# Altium PCB InverterPCB.PcbDoc
Units mm, origin at the board's own origin, x right, y up, seen from the top; angles counter-clockwise.
Board outline 152.4 x 101.6 mm, 2 copper layers (Top Layer, Bottom Layer); 87 components, 59 nets, 321 pads, 0 vias.
Unrouted connection lines stored in the file: 187.
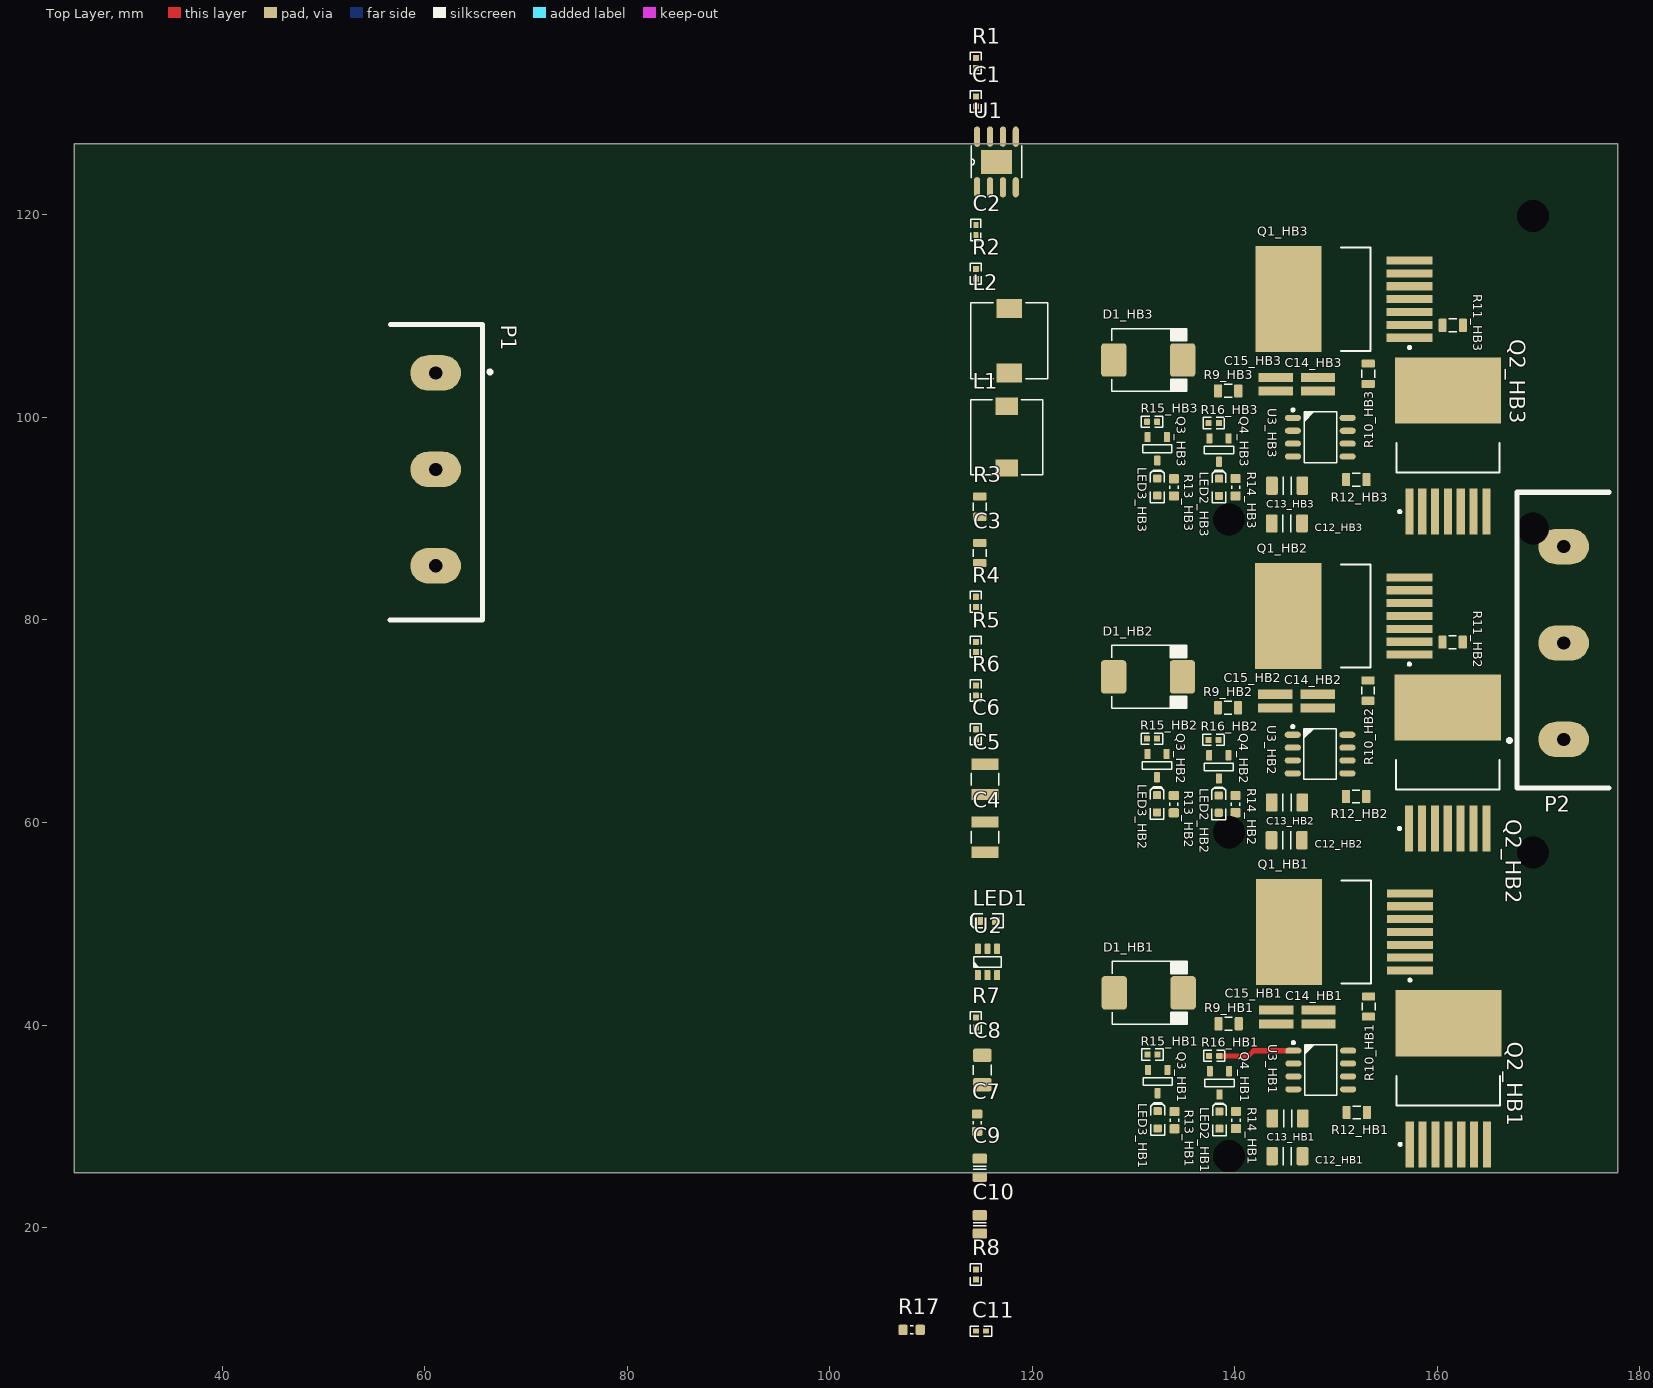
[diagram p0: Top Layer view]
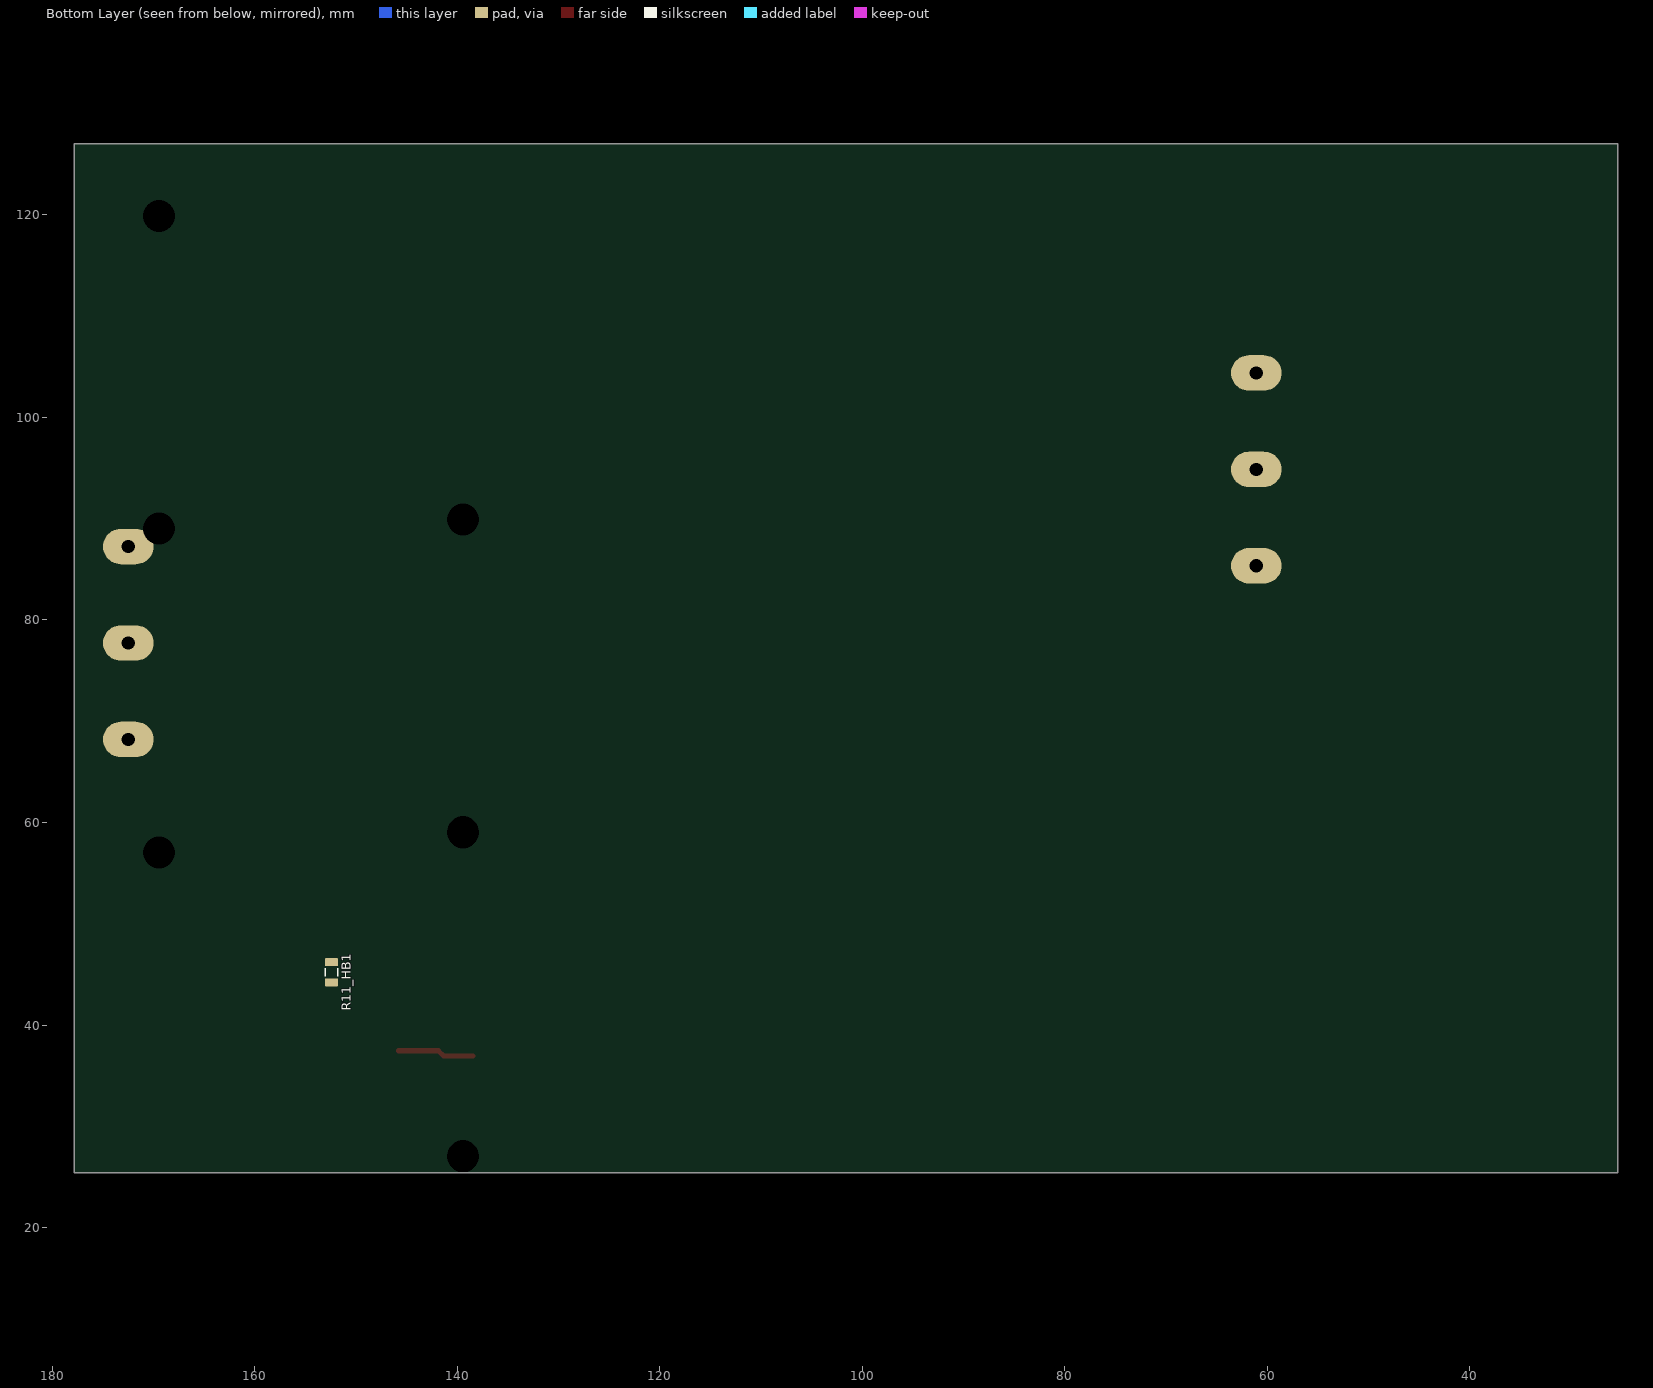
[diagram p1: Bottom Layer view, seen from below]

## Layer stack, top to bottom
Top Solder: solder mask 0.0102, Solder Resist, Dk 3.5
Top Layer: signal copper 0.0356
Dielectric 1: dielectric 0.32, FR-4, Dk 4.8
Bottom Layer: signal copper 0.0356
Bottom Solder: solder mask 0.0102, Solder Resist, Dk 3.5

## Board outline
25.4,25.4 177.8,25.4 177.8,127 25.4,127

## Design rules (kind name [scope] priority, off if disabled: settings)
Clearance Clearance_1 [All] p1: gap=0.152 ignorepadtopadclearanceinfootprint=FALSE
Clearance [InNet('350V')] p2: gap=0.152 ignorepadtopadclearanceinfootprint=FALSE
HoleSize [All] p1: absolutevalues=TRUE maxlimit=25.4 minlimit=0.3 maxpercent=80.000 minpercent=20.000
MinimumAnnularRing [All] p1: minimumring=0.152
MinimumSolderMaskSliver [All] p1: minsoldermaskwidth=0.102
PolygonConnect [All] p1: connectstyle=Relief reliefconductorwidth=0.254 reliefentries=4 polygonreliefangle="90 Angle" airgapwidth=0.254
RoomDefinition HB3 [InComponentClass('HB3')] p1: confinementstyle=ConfineIn formatcopy=TRUE lockcomponents=FALSE outline 125.095,88.011 166.878,88.011 166.878,118.999 125.095,118.999
RoomDefinition HB2 [InComponentClass('HB2')] p2: confinementstyle=ConfineIn formatcopy=TRUE lockcomponents=FALSE outline 125.076,56.727 166.859,56.727 166.859,87.715 125.076,87.715
RoomDefinition HB1 [InComponentClass('HB1')] p3: confinementstyle=ConfineIn formatcopy=TRUE lockcomponents=FALSE outline 125.14,25.527 166.923,25.527 166.923,56.515 125.14,56.515
RoutingVias [All] p1: holewidth=0.254 width=0.508 viastyle="Through Hole" minholewidth=0.203 minwidth=0.457 maxholewidth=25.4 maxwidth=25.4
SilkToSilkClearance [All] p1: silktosilkclearance=0
SilkToSolderMaskClearance [IsPad] p1: minsilkscreentomaskgap=0.102 clearancetoexposedcopper=TRUE
SolderMaskExpansion [All] p1: expansion=0.102
Width [All] p1: maxlimit=25.4 minlimit=0.102 preferedwidth=0.254
26 further rules are at their usual default settings.

## Classes and differential pairs
component class 3.3VPWR: C1 C2 C3 C4 C5 C6 C7 C8 C9 C10 C11 L1 L2 LED1 R1 R2 R3 R4 R5 R6 R7 R8 U1 U2
component class HB1: C12_HB1 C13_HB1 C14_HB1 C15_HB1 D1_HB1 LED2_HB1 LED3_HB1 Q1_HB1 Q2_HB1 Q3_HB1 Q4_HB1 R9_HB1 R10_HB1 R11_HB1 R12_HB1 R13_HB1 R14_HB1 R15_HB1 R16_HB1 U3_HB1
component class HB2: C12_HB2 C13_HB2 C14_HB2 C15_HB2 D1_HB2 LED2_HB2 LED3_HB2 Q1_HB2 Q2_HB2 Q3_HB2 Q4_HB2 R9_HB2 R10_HB2 R11_HB2 R12_HB2 R13_HB2 R14_HB2 R15_HB2 R16_HB2 U3_HB2
component class HB3: C12_HB3 C13_HB3 C14_HB3 C15_HB3 D1_HB3 LED2_HB3 LED3_HB3 Q1_HB3 Q2_HB3 Q3_HB3 Q4_HB3 R9_HB3 R10_HB3 R11_HB3 R12_HB3 R13_HB3 R14_HB3 R15_HB3 R16_HB3 U3_HB3
component class "Inverter Main": P1 P2 R17
net class OUTPUT[1..3]: OUTPUT1 OUTPUT2 OUTPUT3
channel class Half_Bridge: HB1 HB2 HB3

## Components (designator, comment, footprint, x,y, rotation, side; value= is the part's Value field where it differs from the comment)
C1 "GRM155R61A104KA0" 0402 114.427,131.191 r90 top value=Value
C2 "10n" CAPC1005X55N 114.427,118.491 r90 top
C3 "C0805C100M4GACTU" 0805 114.808,86.614 r90 top value=Value
C4 "GRM32ER7YA106KA1" 1210_280 115.316,58.547 r90 top value=Value
C5 "GRM32ER7YA106KA1" 1210_280 115.316,64.262 r90 top value=Value
C6 "GRM155R60J225ME1" 0402 114.427,68.707 r90 top value=Value
C7 "GRM188R61A105KA6" 0603 114.554,30.353 r90 top value=Value
C8 "C3216JB1A476M" 1206 115.062,35.56 r90 top value=Value
C9 "approved sub OK" CAPC2012X135N 114.808,25.908 r90 top value=100n
C10 "approved sub OK" CAPC2012X135N 114.808,20.32 r90 top value=1n8
C11 "10n" CAPC1005X55N 114.935,9.779 r180 top
C12_HB1 "approved sub OK" CAPC3216X180N 145.177,27.051 r180 top value=2µ2 (schematic designator C12)
C12_HB2 "approved sub OK" CAPC3216X180N 145.113,58.251 r180 top value=2µ2 (schematic designator C12)
C12_HB3 "approved sub OK" CAPC3216X180N 145.132,89.535 r180 top value=2µ2 (schematic designator C12)
C13_HB1 "approved sub OK" CAPC3216X180N 145.206,30.776 r180 top value=2µ2 (schematic designator C13)
C13_HB2 "approved sub OK" CAPC3216X180N 145.142,61.976 r180 top value=2µ2 (schematic designator C13)
C13_HB3 "approved sub OK" CAPC3216X180N 145.161,93.26 r180 top value=2µ2 (schematic designator C13)
C14_HB1 "approved sub OK" CAPC1632X07N 148.254,40.793 r90 top value=220n (schematic designator C14)
C14_HB2 "approved sub OK" CAPC1632X07N 148.19,71.993 r90 top value=220n (schematic designator C14)
C14_HB3 "approved sub OK" CAPC1632X07N 148.209,103.277 r90 top value=220n (schematic designator C14)
C15_HB1 "approved sub OK" CAPC1632X07N 144.063,40.793 r90 top value=100n (schematic designator C15)
C15_HB2 "approved sub OK" CAPC1632X07N 143.999,71.993 r90 top value=100n (schematic designator C15)
C15_HB3 "approved sub OK" CAPC1632X07N 144.018,103.277 r90 top value=100n (schematic designator C15)
D1_HB1 "FR10M-TP" DO-214AB 131.49,43.18 r0 top (schematic designator D1)
D1_HB2 "FR10M-TP" DO-214AB 131.426,74.38 r0 top (schematic designator D1)
D1_HB3 "FR10M-TP" DO-214AB 131.445,105.664 r0 top (schematic designator D1)
L1 "CLF7045T-3R3N" CLF7045 117.475,98.044 r90 top value=Value
L2 "SLC7649S-101KLB" SLC7649 117.729,107.569 r90 top value=Value
LED1 "Green" LED-0603-GREEN 115.57,50.292 r180 top
LED2_HB1 "APT1608CGCK" LED-0603-GREEN 138.467,30.615 r90 top (schematic designator LED2)
LED2_HB2 "APT1608CGCK" LED-0603-GREEN 138.403,61.815 r90 top (schematic designator LED2)
LED2_HB3 "APT1608CGCK" LED-0603-GREEN 138.422,93.099 r90 top (schematic designator LED2)
LED3_HB1 "LO L296-Q2S1-24-Z" LED-0603-AMBER 132.379,30.646 r90 top (schematic designator LED3)
LED3_HB2 "LO L296-Q2S1-24-Z" LED-0603-AMBER 132.315,61.846 r90 top (schematic designator LED3)
LED3_HB3 "LO L296-Q2S1-24-Z" LED-0603-AMBER 132.334,93.13 r90 top (schematic designator LED3)
P1 "3P_TERM BLOCK 796739-3" "TE 796739-3 3 Screw Terminal" 61.087,94.869 r270 top
P2 "3P_TERM BLOCK 796739-3" "TE 796739-3 3 Screw Terminal" 172.466,77.724 r90 top
Q1_HB1 "C3M0065090D" DPAK127P1618X457-8N 150.54,49.191 r180 top (schematic designator Q1)
Q1_HB2 "C3M0065090D" DPAK127P1618X457-8N 150.476,80.391 r180 top (schematic designator Q1)
Q1_HB3 "C3M0065090D" DPAK127P1618X457-8N 150.495,111.675 r180 top (schematic designator Q1)
Q2_HB1 "C3M0065090D" DPAK127P1618X457-8N 161.081,34.967 r90 top (schematic designator Q2)
Q2_HB2 "C3M0065090D" DPAK127P1618X457-8N 161.017,66.167 r90 top (schematic designator Q2)
Q2_HB3 "C3M0065090D" DPAK127P1618X457-8N 161.036,97.451 r90 top (schematic designator Q2)
Q3_HB1 "Si2304DDS" SOT23-3 132.379,34.417 r270 top (schematic designator Q3)
Q3_HB2 "Si2304DDS" SOT23-3 132.315,65.617 r270 top (schematic designator Q3)
Q3_HB3 "Si2304DDS" SOT23-3 132.334,96.901 r270 top (schematic designator Q3)
Q4_HB1 "Si2304DDS" SOT23-3 138.475,34.29 r270 top (schematic designator Q4)
Q4_HB2 "Si2304DDS" SOT23-3 138.411,65.49 r270 top (schematic designator Q4)
Q4_HB3 "Si2304DDS" SOT23-3 138.43,96.774 r270 top (schematic designator Q4)
R1 "Thick Film" RESC1005X40N 114.427,135.001 r90 top value=68K
R2 "Thick Film" RESC1005X40N 114.427,114.173 r90 top value=100K
R3 "Thick film" RESC2012X70N 114.808,91.186 r90 top value=12m
R4 "CRCW040284K5FKED" 0402 114.427,81.788 r90 top value=Value
R5 "Thick Film" RESC1005X40N 114.427,77.343 r90 top value=68R
R6 "Thick Film" RESC1005X40N 114.427,73.025 r90 top value=10K
R7 "CRCW040225K5FKED" 0402 114.427,40.259 r90 top value=Value
R8 "Thick Film" RESC1005X40N 114.427,15.367 r90 top value=40.2K
R9_HB1 "Jumper" RESC2012N_ZERO 139.38,40.132 r0 top value=0R (schematic designator R9)
R9_HB2 "Jumper" RESC2012N_ZERO 139.316,71.332 r0 top value=0R (schematic designator R9)
R9_HB3 "Jumper" RESC2012N_ZERO 139.335,102.616 r0 top value=0R (schematic designator R9)
R10_HB1 "Thick Film" RESC2012X70N 153.207,41.825 r90 top value=3R3 (schematic designator R10)
R10_HB2 "Thick Film" RESC2012X70N 153.143,73.025 r90 top value=3R3 (schematic designator R10)
R10_HB3 "Thick Film" RESC2012X70N 153.162,104.309 r90 top value=3R3 (schematic designator R10)
R11_HB1 "Jumper" RESC2012N_ZERO 152.4,45.212 r90 bottom value=0R (schematic designator R11)
R11_HB2 "Jumper" RESC2012N_ZERO 161.496,77.809 r180 top value=0R (schematic designator R11)
R11_HB3 "Jumper" RESC2012N_ZERO 161.515,109.093 r180 top value=0R (schematic designator R11)
R12_HB1 "Thick Film" RESC2012X70N 152.035,31.369 r0 top value=3R3 (schematic designator R12)
R12_HB2 "Thick Film" RESC2012X70N 151.971,62.569 r0 top value=3R3 (schematic designator R12)
R12_HB3 "Thick Film" RESC2012X70N 151.99,93.853 r0 top value=3R3 (schematic designator R12)
R13_HB1 "Thick Film" RESC1608X55N 134.03,30.607 r270 top value=68R (schematic designator R13)
R13_HB2 "Thick Film" RESC1608X55N 133.966,61.807 r270 top value=68R (schematic designator R13)
R13_HB3 "Thick Film" RESC1608X55N 133.985,93.091 r270 top value=68R (schematic designator R13)
R14_HB1 "Thick Film" RESC1608X55N 140.118,30.615 r270 top value=68R (schematic designator R14)
R14_HB2 "Thick Film" RESC1608X55N 140.054,61.815 r270 top value=68R (schematic designator R14)
R14_HB3 "Thick Film" RESC1608X55N 140.073,93.099 r270 top value=68R (schematic designator R14)
R15_HB1 "Thick Film" RESC1005X40N 131.871,37.084 r180 top value=10K (schematic designator R15)
R15_HB2 "Thick Film" RESC1005X40N 131.807,68.284 r180 top value=10K (schematic designator R15)
R15_HB3 "Thick Film" RESC1005X40N 131.826,99.568 r180 top value=10K (schematic designator R15)
R16_HB1 "Thick Film" RESC1005X40N 137.959,36.957 r180 top value=10K (schematic designator R16)
R16_HB2 "Thick Film" RESC1005X40N 137.895,68.157 r180 top value=10K (schematic designator R16)
R16_HB3 "Thick Film" RESC1005X40N 137.914,99.441 r180 top value=10K (schematic designator R16)
R17 "Thick Film" RESC1608N_ZERO 108.077,9.906 r180 top value=0R
U1 "TPS54339DDAR" DDA0008E 116.459,125.222 r90 top value=Value
U2 "TS1101-50EG6T" SOT23-6 115.57,46.228 r90 top
U3_HB1 "FAN7390MX" SOIC127P600X175-8AN 148.479,35.56 r0 top (schematic designator U3)
U3_HB2 "FAN7390MX" SOIC127P600X175-8AN 148.415,66.76 r0 top (schematic designator U3)
U3_HB3 "FAN7390MX" SOIC127P600X175-8AN 148.434,98.044 r0 top (schematic designator U3)

## Footprints (in the part's own frame and the unit in brackets; to place one, negate y for a bottom-side part, rotate by r counter-clockwise, add the part's x,y. Pads: shape width x height; smd on the part's side, far side on the other; paste and mask are expansions set on the pad)
0402 [mm] "Chip Resistor, Body 1.0x0.5mm, EIA 0402, IPC Medium Density"
  round 0.2 on Mech15: 0(0,0)
  rrect20% 0.6x0.6 smd: 1(-0.5,0) 2(0.5,0)
  Top Layer pour cut-out: -0.325,0.375 -0.2,0.5 0.2,0.5 0.325,0.375 0.325,-0.375 0.2,-0.5 -0.2,-0.5 -0.325,-0.375
  silkscreen extent -1.05,-0.55 1.05,0.55, body extent -0.52,-0.27 0.53,0.28, height 0.4
0603 [mm] "Chip Resistor, Body 1.6x0.8mm, EIA 0603, IPC Medium Density"
  round 0.254 on Mech15: 0(0,0)
  rrect25% 0.9x1 smd: 1(-0.85,0) 2(0.85,0)
  Top Layer pour cut-out: -0.6,0.5 -0.4,0.7 0.4,0.7 0.6,0.5 0.6,-0.5 0.4,-0.7 -0.4,-0.7 -0.6,-0.5
  silkscreen extent -0.15,-0.41 0.15,0.41, body extent -0.87,-0.47 0.88,0.48, height 0.54
0805 [mm] "Chip Resistor, Body 2.0x1.2mm, EIA 0805, IPC Medium Density"
  round 0.254 on Mech15: 0(0,0)
  rrect25% 0.8x1.3 smd: 1(-1,0) 2(1,0)
  Top Layer pour cut-out: -0.725,0.65 -0.525,0.85 0.525,0.85 0.725,0.65 0.725,-0.65 0.525,-0.85 -0.525,-0.85 -0.725,-0.65
  silkscreen extent -0.38,-0.64 0.38,0.64, body extent -1.1,-0.67 1.1,0.68, height 0.69
1206 [mm] "Chip Resistor, Body 3.2x1.6mm, EIA 1206, IPC Medium Density"
  round 0.508 on Mech15: 0(0,0)
  rrect25% 1.3x1.8 smd: 1(-1.45,0) 2(1.45,0)
  silkscreen extent -0.51,-0.89 0.51,0.89, body extent -1.62,-0.82 1.63,0.83, height 0.69
1210_280 [mil]
  rect 44x106 smd: 1(-59,0) 2(59,0)
  silkscreen extent -24,-53 24,53, body extent -63,-49 63,49, height 98
CAPC1005X55N [mm] "Chip Capacitor, Body 1.0x0.5mm, EIA 0402, IPC Medium Density"
  round 0.2 on Mech15: 0(0,0)
  rrect20% 0.6x0.5 smd: 1(-0.5,0) 2(0.5,0)
  Top Layer pour cut-out: -0.325,0.375 -0.2,0.5 0.2,0.5 0.325,0.375 0.325,-0.375 0.2,-0.5 -0.2,-0.5 -0.325,-0.375
  silkscreen extent -1.05,-0.5 1.05,0.5, body extent -0.52,-0.27 0.53,0.28, height 0.55
CAPC1632X07N [mm] "Chip Capacitor, 0612 (1632M)  2-Leads, Body 1.60x3.20mm, IPC Medium Density"
  rect 0.9x3.4 smd: 1(-0.675,0) 2(0.675,0)
  body extent -0.87,-1.68 0.87,1.68, height 0.7
CAPC2012X135N [mm] "Chip Capacitor, Body 2.0x1.2mm, EIA 0805, IPC Medium Density"
  round 0.254 on Mech15: 0(0,0)
  rrect25% 1x1.4 smd: 1(-0.9,0) 2(0.9,0)
  silkscreen extent -0.15,-0.65 0.15,0.65, body extent -1.1,-0.72 1.1,0.73, height 1.34
CAPC3216X180N [mm] "Chip Capacitor, Body 3.2x1.6mm, 1.8mm H, EIA 1206, IPC Medium Density"
  round 0.508 on Mech15: 0(0,0)
  rrect25% 1.15x1.8 smd: 1(-1.5,0) 2(1.5,0)
  silkscreen extent -0.4,-0.88 0.4,0.88, body extent -1.7,-0.9 1.7,0.9, height 1.8
CLF7045 [mil]
  rect 67x87 smd: 1(-120,0) 2(120,0)
  silkscreen extent -146,-140 146,140, body extent -142,-136 142,136, height 213
DDA0008E [mm]
  oval 2x0.6 smd paste-0.102 mask+0.051: 1(-2.5,1.905) 2(-2.5,0.635) 3(-2.5,-0.635) 4(-2.5,-1.905) 5(2.5,-1.905) 6(2.5,-0.635) 7(2.5,0.635) 8(2.5,1.905)
  rect 2.4x3.1 smd paste-0.102 mask+0.051: 9(0,0)
  silkscreen extent -1.58,-2.49 1.58,2.49, body extent -3,-2.45 3,2.45, height 1.75
DO-214AB [mm] "JEDEC DO214 variation AB. SMC"
  round 0.508 on Mech15: 0(0,0)
  rrect25% 2.5x3.3 smd: A(-3.4,0) K(3.4,0)
  silkscreen extent -3.6,-3.1 3.8,3.1, body extent -3.98,-2.98 4.05,2.98, height 2.62
DPAK127P1618X457-8N [mm] "TO, 8-Pads, Body 7.66x8.48mm (max), IPC Medium Density"
  rect 4.55x0.8 smd: 1(-6.75,3.81) 2(-6.75,2.54) 3(-6.75,1.27) 4(-6.75,0) 5(-6.75,-1.27) 6(-6.75,-2.54) 7(-6.75,-3.81)
  rect 6.538x10.48 smd: 8(5.2,0)
  silkscreen extent -6.88,-5.1 0,5.1, body extent -8.21,-5.13 7.96,5.13, height 4.82
LED-0603-AMBER [mm]
  round 0.254 on Mech15: 0(0,0)
  rrect25% 0.8x0.8 smd: A(-0.85,0) K(0.85,0)
  Top Layer pour cut-out: -0.5,0.5 0.5,0.5 0.5,-0.5 -0.5,-0.5
  silkscreen extent -1.55,-0.67 1.68,0.67, body extent -0.8,-0.4 0.8,0.4, height 0.75
LED-0603-GREEN [mm]
  round 0.254 on Mech15: 0(0,0)
  rrect25% 0.8x0.8 smd: A(-0.85,0) K(0.85,0)
  Top Layer pour cut-out: -0.5,0.5 0.5,0.5 0.5,-0.5 -0.5,-0.5
  silkscreen extent -1.55,-0.67 1.68,0.67, body extent -0.8,-0.4 0.8,0.4, height 0.75
RESC1005X40N [mm] "Chip Resistor, Body 1.0x0.5mm, EIA 0402, IPC Medium Density"
  round 0.2 on Mech15: 0(0,0)
  rrect20% 0.6x0.6 smd: 1(-0.5,0) 2(0.5,0)
  Top Layer pour cut-out: -0.325,0.375 -0.2,0.5 0.2,0.5 0.325,0.375 0.325,-0.375 0.2,-0.5 -0.2,-0.5 -0.325,-0.375
  silkscreen extent -1.05,-0.55 1.05,0.55, body extent -0.52,-0.27 0.53,0.28, height 0.4
RESC1608N_ZERO [mm] "Chip Resistor, Body 1.6x0.8mm, 0603, IPC Medium Density"
  round 0.254 on Mech15: 0(0,0)
  rrect25% 0.9x1 smd: 1(-0.85,0) 2(0.85,0)
  Top Layer pour cut-out: -0.6,0.5 -0.4,0.7 0.4,0.7 0.6,0.5 0.6,-0.5 0.4,-0.7 -0.4,-0.7 -0.6,-0.5
  silkscreen extent -0.15,-0.41 0.15,0.41, body extent -0.87,-0.47 0.88,0.48, height 0.54
RESC1608X55N [mm] "Chip Resistor, Body 1.6x0.8mm, EIA 0603, IPC Medium Density"
  round 0.254 on Mech15: 0(0,0)
  rrect25% 0.9x1 smd: 1(-0.85,0) 2(0.85,0)
  Top Layer pour cut-out: -0.6,0.5 -0.4,0.7 0.4,0.7 0.6,0.5 0.6,-0.5 0.4,-0.7 -0.4,-0.7 -0.6,-0.5
  silkscreen extent -0.15,-0.41 0.15,0.41, body extent -0.87,-0.47 0.88,0.48, height 0.54
RESC2012N_ZERO [mm] "Chip Resistor, Body 2.0x1.2mm, 0805, IPC Medium Density"
  round 0.254 on Mech15: 0(0,0)
  rrect25% 0.8x1.3 smd: 1(-1,0) 2(1,0)
  Top Layer pour cut-out: -0.725,0.65 -0.525,0.85 0.525,0.85 0.725,0.65 0.725,-0.65 0.525,-0.85 -0.525,-0.85 -0.725,-0.65
  silkscreen extent -0.38,-0.64 0.38,0.64, body extent -1.1,-0.67 1.1,0.68, height 0.69
RESC2012X70N [mm] "Chip Resistor, Body 2.0x1.2mm, EIA 0805, IPC Medium Density"
  round 0.254 on Mech15: 0(0,0)
  rrect25% 0.8x1.3 smd: 1(-1,0) 2(1,0)
  Top Layer pour cut-out: -0.725,0.65 -0.525,0.85 0.525,0.85 0.725,0.65 0.725,-0.65 0.525,-0.85 -0.525,-0.85 -0.725,-0.65
  silkscreen extent -0.38,-0.64 0.38,0.64, body extent -1.1,-0.67 1.1,0.68, height 0.69
SLC7649 [mm]
  rect 1.905x2.54 smd: 1(-3.175,0) 2(3.175,0)
  silkscreen extent -3.75,-3.81 3.75,3.81, body extent -3.75,-3.8 3.75,3.8, height 4.95
SOIC127P600X175-8AN [mm] "SOIC, 8-Leads, Body 4.9x3.9mm, Pitch 1.27mm, IPC Medium Density"
  round 1 on Mech15: 0(0,0)
  oval 1.6x0.6 smd: 1(-2.7,1.905) 2(-2.7,0.635) 3(-2.7,-0.635) 4(-2.7,-1.905) 5(2.7,-1.905) 6(2.7,-0.635) 7(2.7,0.635) 8(2.7,1.905)
  silkscreen extent -2.82,-2.5 1.6,2.82, body extent -3,-2.45 3,2.45, height 1.75
SOT23-3 [mm] "SOT23, 3 pin"
  round 0.5 on Mech15: 0(0,0)
  rrect25% 1x0.6 smd: 1(-1.15,0.95) 2(-1.15,-0.95) 3(1.15,0)
  silkscreen extent -0.38,-1.45 0.38,1.45, body extent -1.4,-1.45 1.4,1.45, height 1.29
SOT23-6 [mm]
  round 0.5 on Mech15: 0(0,0)
  rrect25% 1x0.6 smd: 1(-1.3,0.95) 2(-1.3,0) 3(-1.3,-0.95) 4(1.3,-0.95) 5(1.3,0) 6(1.3,0.95)
  silkscreen extent -0.51,-1.35 0.51,1.35, body extent -1.4,-1.45 1.4,1.45, height 1.44
"TE 796739-3 3 Screw Terminal" [mm]
  oval 3.5x5 hole 1.3: 1(-9.52,0) 2(0,0) 3(9.52,0)
  silkscreen extent -14.3,-4.5 14.88,5.45, body extent -14.28,-7.88 14.88,4.62, height 21.65

## Part data
C1: "Imported", Manufacturer_Name=MuRata, Manufacturer_Part_Number=GRM155R61A104KA01D, Supplier Part Number 1=490-1318-1-ND, RefDes=RefDes, Supplier 1=Digi-Key, Type=TYPE, Vendor=MuRata
C2 C11: library part CAPC_10n_0402_X7R_16V_10%, "Capacitor SMD Cer 10nF 10% 16V X7R 0402", Operating Temperature="-55°C ~ 125°C", Package / Case="0402 (1005 Metric)", Ratings="16V; X7R", Supplier Part Number 1=709-1127-1-ND, Tolerance=±10%, ComponentLink1Description=http://www.avx.com/docs/Catalogs/cx7r.pdf, ComponentLink1URL=http://www.avx.com/docs/Catalogs/cx7r.pdf, ComponentLink2Description=http://www.yageo.com/documents/recent/UPY-GPHC_X7R_6.3V-to-50V_8.pdf, ComponentLink2URL=http://www.yageo.com/documents/recent/UPY-GPHC_X7R_6.3V-to-50V_8.pdf, SCDType=spec, Size / Dimension="0.039\" L x 0.020\" W (1.00mm x 0.50mm)", Supplier 1=Digi-Key
C3: "Imported", Manufacturer_Name=Kemet, Supplier Part Number 1=399-9147-1-ND, Manufacturer_Part_Number=C0805C100M4GACTU, RefDes=RefDes, Supplier 1=Digi-Key, Type=TYPE, Vendor=Kemet
C4 C5: "Imported", Manufacturer_Name=MuRata, Manufacturer_Part_Number=GRM32ER7YA106KA12L, Supplier Part Number 1=490-5314-1-ND, RefDes=RefDes, Supplier 1=Digi-Key, Type=TYPE, Vendor=MuRata
C6: "Imported", Manufacturer_Name=MuRata, Manufacturer_Part_Number=GRM155R60J225ME15D, Supplier Part Number 1=490-4519-1-ND, RefDes=RefDes, Supplier 1=Digi-Key, Type=TYPE, Vendor=MuRata
C7: "Imported", Manufacturer_Name=MuRata, Manufacturer_Part_Number=GRM188R61A105KA61D, Supplier Part Number 1=490-1543-1-ND, RefDes=RefDes, Supplier 1=Digi-Key, Type=TYPE, Vendor=MuRata
C8: "Imported", Manufacturer_Name=TDK, Supplier Part Number 1=445-11686-1-ND, Manufacturer_Part_Number=C3216JB1A476M, RefDes=RefDes, Supplier 1=Digi-Key, Type=TYPE, Vendor=TDK
C9: library part CAPC_100n_0805_X7R_50V_10%, "Capacitor SMD Cer 100nF 10% 50V X7R 0805", Manufacturer 1=Kemet, Manufacturer Part Number 1=C0805C104K5RACTU, Package / Case="0805 (2012 metric)", Ratings="50V; X7R", Supplier Part Number 1=399-1170-1-ND, Tolerance=±10%, Material=ceramic, SCDType=undef, Supplier 1=Digi-Key
C10: library part CAPC_1n8_50V_0805, "Capacitor SMD Cer 1.8nF 10% 50V X7R 0805", Manufacturer 1="AVX Corporation", Manufacturer Part Number 1=08055C182KAT2A, Operating Temperature="-55°C ~ 125°C", Package / Case="0805 (2012 metric)", Ratings="50V; X7R", Supplier Part Number 1=478-1374-1-ND, Tolerance=±10%, SCDType=source*, Supplier 1=Digi-Key
C12_HB1 C12_HB2 C12_HB3 C13_HB1 C13_HB2 C13_HB3: library part CAPC_2u2_50V_1206, "Capacitor SMD Cer 2.2uF 10% 50V X7R 1206", Supplier Part Number 1=1276-1291-1-ND, Tolerance=±10%, SCDType=undef, Supplier 1=Digi-Key
C14_HB1 C14_HB2 C14_HB3: library part CAPC_220n_0612_X7R_25V_10%, "Capacitor SMD Cer 220nF 10% 25V X7R 0612", Manufacturer="AVX Corporation", Manufacturer Part Number=06123C224KAT2A, Operating Temperature="-55°C ~ 125°C", Package / Case="0612 (1632 Metric)", Ratings=-, Supplier Part Number 1=478-2902-1-ND, Temperature Coefficient=X7R, Tolerance=±20%, Voltage - Rated=25V, Applications="Bypass, Decoupling", Category=Capacitors, ComponentLink1Description=http://datasheets.avx.com/licc.pdf, ComponentLink1URL=http://datasheets.avx.com/licc.pdf, Features="Low ESL (Reverse Geometry)", Height - Seated (Max)=-, Lead Spacing=-, Lead Style=-, Mounting Type="Surface Mount, MLCC", Packaging="Cut Tape (CT)", Part Status=Active, Pricing 1="1=1.73, 10=1.366, 100=1.0247, 500=0.77418, 1000=0.6831 (USD)", RoHS="RoHS Compliant", Size / Dimension="0.063\" L x 0.126\" W (1.60mm x 3.20mm)", Stock 1=3680, Supplier 1=Digi-Key, Thickness (Max)="0.050\" (1.27mm)"
C15_HB1 C15_HB2 C15_HB3: library part CAPC_100n_0612_X7R_25V_20%, "Capacitor SMD Cer 100nF 20% 25V X7R 0612", Manufacturer="Murata Electronics North America", Manufacturer Part Number=LLL317R71E104MA01L, Operating Temperature="-55°C ~ 125°C", Package / Case="0612 (1632 Metric)", Ratings=-, Supplier Part Number 1=490-4378-1-ND, Temperature Coefficient=X7R, Tolerance=±20%, Voltage - Rated=25V, Applications="Bypass, Decoupling", Category=Capacitors, ComponentLink1Description=http://search.murata.co.jp/Ceramy/image/img/A01X/G101/ENG/LLL317R71E104MA01-01.pdf, ComponentLink1URL=http://search.murata.co.jp/Ceramy/image/img/A01X/G101/ENG/LLL317R71E104MA01-01.pdf, Features="Low ESL (Reverse Geometry)", Height - Seated (Max)=-, Lead Spacing=-, Lead Style=-, Mounting Type="Surface Mount, MLCC", Packaging="Cut Tape (CT)", Part Status=Active, Pricing 1="1=0.45, 10=0.312, 100=0.1871, 500=0.1403, 1000=0.11848 (USD)", RoHS="RoHS Compliant", Size / Dimension="0.063\" L x 0.126\" W (1.60mm x 3.20mm)", Stock 1=8336, Supplier 1=Digi-Key, Thickness (Max)="0.032\" (0.80mm)"
D1_HB1 D1_HB2 D1_HB3: library part DIODE_1000V_10A_SMC_FR10M-TP, "Diode Standard 1000V 10A Surface Mount DO-214AB, (SMC)", Capacitance @ Vr, F=-, Current - Average Rectified (Io)=10A, Current - Reverse Leakage @ Vr="10µA @ 1000V", Manufacturer="Micro Commercial Co", Operating Temperature - Junction="-55°C ~ 150°C", Package / Case="DO-214AB, SMC", Supplier Device Package="DO-214AB, (SMC)", Supplier Part Number 1=FR10M-TPMSCT-ND, Voltage - Forward (Vf) (Max) @ If="1.3V @ 10A", Category="Discrete Semiconductor Products", ComponentLink1Description=http://www.mccsemi.com/up_pdf/FR10A-FR10M(HSMC).pdf, ComponentLink1URL=http://www.mccsemi.com/up_pdf/FR10A-FR10M(HSMC).pdf, Diode Type=Standard, Manufacturer Part Number=FR10M-TP, Mounting Type="Surface Mount", Packaging="Cut Tape (CT)", Part Status=Active, Pricing 1="1=0.78, 10=0.681, 25=0.6036, 100=0.5256, 250=0.45748, 500=0.38934 (USD)", RoHS="RoHS Compliant", Speed="Fast Recovery =< 500ns, > 200mA (Io)", Stock 1=6, Supplier 1=Digi-Key
L1: "Imported", Manufacturer=TDK, PACKAGE_DESIGNATOR=CLF7045, Supplier Part Number 1=445-9289-1-ND, Manufacturer_Name=TDK, Manufacturer_Part_Number=CLF7045T-3R3N, RefDes=RefDes, Supplier 1=Digi-Key, Type=TYPE, Vendor=TDK
L2: "Imported", Manufacturer_Name=Coilcraft, Supplier Part Number 1=994-SLC7649S-101KLB, Manufacturer_Part_Number=SLC7649S-101KLB, RefDes=RefDes, Supplier 1=Mouser, Type=TYPE, Vendor=Coilcraft
LED1: library part LED_SMD_Green_0603_525nm_350mcd, "LED 0603 SMD Green 525nm 350mcd 20mA", Current - Test=20mA, Package / Case="0603 (1608 metric)", Ratings="200mcd min; 350 mcd typ @ 20mA", Supplier Part Number 1=160-1183-1-ND, Voltage - Forward (Vf) @ 10mA=3.1V, Voltage - Forward (Vf) @ 20mA=3.3V, Color=Green, ComponentLink1Description=http://www.mouser.com/ds/2/216/APT1608ZGCK-262051.pdf, ComponentLink1URL=http://www.mouser.com/ds/2/216/APT1608ZGCK-262051.pdf, ComponentLink2Description="APT1608-WAP24 Datasheet", ComponentLink2URL="\\SVFI2\PBLShare\Eng\Electrical Engineering\Hardware\Altium\Libraries and Templates\Unreleased Components\Part Number Request 2013-10-02\APT1608-WAP24(Ver.1B).pdf", Lens Style/Size="Rectangle with Flat Top, 1.2mm x 0.8mm", Material=InGaN, SCDType=source, Supplier 1=Digi-Key, Viewing Angle=120°
LED2_HB1 LED2_HB2 LED2_HB3: library part LED_SMD_Green_0603_50mcd, "Green 570nm LED Indication - Discrete 2.1V 0603 (1608 Metric)", Color=Green, Current - Test=20mA, Lens Color=Colorless, Manufacturer=Kingbright, Millicandela Rating=50mcd, Package / Case="0603 (1608 Metric)", Supplier Device Package="Chip LED", Supplier Part Number 1=754-1116-1-ND, Voltage - Forward (Vf) (Typ)=2.1V, Category=Optoelectronics, ComponentLink1Description=http://www.kingbrightusa.com/images/catalog/SPEC/APT1608CGCK.pdf, ComponentLink1URL=http://www.kingbrightusa.com/images/catalog/SPEC/APT1608CGCK.pdf, Features=-, Height (Max)=0.75mm, Lens Style/Size="Rectangle with Flat Top, 1.20mm x 0.80mm", Lens Transparency=Clear, Manufacturer Part Number=APT1608CGCK, Mounting Type="Surface Mount", Packaging="Cut Tape (CT)", Part Status=Active, Pricing 1="1=0.47, 10=0.337, 25=0.258, 100=0.1683, 250=0.12344, 500=0.10472, 1000=0.08602 (USD)", RoHS="RoHS Compliant", Size / Dimension="1.60mm L x 0.80mm W", Stock 1=896844, Supplier 1=Digi-Key, Viewing Angle=120°, Wavelength - Dominant=570nm, Wavelength - Peak=574nm
LED3_HB1 LED3_HB2 LED3_HB3: library part LED_0603_Orange, "LED ORANGE DIFFUSED 0603 SMD", Color=Orange, Current - Test=20mA, Lens Color=White, Manufacturer="OSRAM Opto Semiconductors Inc.", Millicandela Rating=157mcd, Package / Case="0603 (1608 Metric)", Supplier Part Number 1=475-2739-1-ND, Voltage - Forward (Vf) (Typ)=2V, Category=Optoelectronics, ComponentLink1Description=http://www.osram-os.com/Graphics/XPic9/00077122_0.pdf, ComponentLink1URL=http://www.osram-os.com/Graphics/XPic9/00077122_0.pdf, Features=-, Height (Max)=0.65mm, Lens Style/Size="Rectangle with Flat Top, 1.30mm x 0.80mm", Lens Transparency=Diffused, Manufacturer Part Number="LO L296-Q2S1-24-Z", Mounting Type="Surface Mount", Packaging="Cut Tape (CT)", Part Status=Active, Pricing 1="1=0.34, 10=0.245, 25=0.2004, 100=0.1603, 250=0.13524, 500=0.11522, 1000=0.09017, 2500=0.08349 (USD)", RoHS="RoHS Compliant", Size / Dimension="1.70mm L x 0.80mm W", Stock 1=4435, Supplier 1=Digi-Key, Viewing Angle=160°, Wavelength - Dominant=605nm, Wavelength - Peak=-
P1 P2: "3 Position Wire to Board Terminal Block Horizontal with Board 0.375\" (9.53mm) Through Hole", Color=Green, Current=30A, Manufacturer="TE Connectivity AMP Connectors", Manufacturer Part Number=796739-3, Operating Temperature=-, Supplier Part Number 1=A98274-ND, Voltage=600V, Category="Connectors, Interconnects", Clamp Material - Plating="Brass - Nickel Plated", ComponentLink1Description=http://www.te.com/commerce/DocumentDelivery/DDEController?Action=srchrtrv&DocNm=796739&DocType=Customer+Drawing&DocLang=English, ComponentLink1URL=http://www.te.com/commerce/DocumentDelivery/DDEController?Action=srchrtrv&DocNm=796739&DocType=Customer+Drawing&DocLang=English, Contact Material - Plating=-, Features="Interlocking (Side)", Housing Material="Polyamide (PA66), Nylon 6/6", Mating Orientation="Horizontal with Board", Mounting Type="Through Hole", Number of Levels=1, Packaging=Tray, Part Status=Active, Pitch="0.375\" (9.53mm)", Positions Per Level=3, Pricing 1="1=5.17, 10=3.942, 25=3.692, 50=3.2816, 100=3.2104, 250=2.96064, 500=2.6753, 1000=2.37209, 2500=2.274 (USD)", RoHS="RoHS Compliant", Screw Material - Plating="Brass - Nickel Plated", Screw Thread=M3, Stock 1=1080, Supplier 1=Digi-Key, Torque - Screw="0.79 Nm (7.0 Lb-In)", Wire Gauge="10-30 AWG", Wire Termination="Screw - Rising Cage Clamp"
Q1_HB1 Q1_HB2 Q1_HB3 Q2_HB1 Q2_HB2 Q2_HB3: library part SiC_N-CHAN_900V_11A_C3M0280090J, "N-Channel 36A (Tc) 125W (Tc) Through Hole TO-247-3", Current - Continuous Drain (Id) @ 25°C="11A (Tc)", Drive Voltage (Max Rds On,  Min Rds On)=15V, Input Capacitance (Ciss) (Max) @ Vds="150pF @ 600V", Manufacturer=Cree/Wolfspeed, Manufacturer Part Number=C3M0280090J, Operating Temperature="-55°C ~ 150°C (TJ)", Package / Case="TO-263-8, D²Pak (7 Leads + Tab), TO-263CA", Power Dissipation (Max)="50W (Tc)", Supplier Device Package=D2PAK-7, Supplier Part Number 1=C3M0280090J-ND, Category="Discrete Semiconductor Products", ComponentLink1Description=http://www.wolfspeed.com/media/downloads/835/C3M0280090J.pdf, ComponentLink1URL=http://www.wolfspeed.com/media/downloads/835/C3M0280090J.pdf, FET Feature=-, FET Type=N-Channel, Gate Charge (Qg) (Max) @ Vgs="9.5nC @ 15V", Mounting Type="Surface Mount", Packaging=Tube, Part Status=Active, Pricing 1="1=3.84 (USD)", Rds On (Max) @ Id, Vgs="360 mOhm @ 7.5A, 15V", RoHS="RoHS Compliant", Stock 1=713, Supplier 1=Digi-Key, Technology="SiCFET (Silicon Carbide)", Vgs (Max)="+18V, -8V", Vgs(th) (Max) @ Id="3.5V @ 1.2mA"
Q3_HB1 Q3_HB2 Q3_HB3 Q4_HB1 Q4_HB2 Q4_HB3: library part MOSFET_Si2304DDS, "MOSFET SMD N-CH 30V 3.6A 1.7W SOT23-3", Package / Case=SOT23-3, Ratings="30V; 3.6A", Supplier Part Number 1=SI2304DDS-T1-GE3CT-ND, Material="Metal Oxide", SCDType=source, Supplier 1=Digi-Key
R1: library part RES_68K_0402_1%, "Resistor SMD chip 68 Ohm 0.063W 5% 0402", Package / Case="0402 (1005 Metric)", Ratings="1/16 W", Supplier Part Number 1=311-68.0KLRCT-ND, Tolerance=±1%, Supplier 1=Digi-Key
R2: library part RES_100K_0402_1%, "Resistor SMD chip 100k Ohm 0.063W 1% 0402", Package / Case="0402 (1005 Metric)", Ratings="1/16 W", Supplier Part Number 1=311-100KLRCT-ND, Tolerance=±1%, ComponentLink1Description=http://www.vishay.com/doc?20035, ComponentLink1URL=http://www.vishay.com/doc?20035, ComponentLink2Description=http://www.yageo.com/documents/recent/PYu-RC0402_51_RoHS_L_6.pdf, ComponentLink2URL=http://www.yageo.com/documents/recent/PYu-RC0402_51_RoHS_L_6.pdf, SCDType=undef, Supplier 1=Digi-Key, Supplier 2=Digi-Key, Supplier Part Number 2=P100KJCT-ND
R3: library part RES_0R012_0805_1/4W_1%, "RES SMD 0.012 OHM 1% 1/2W 0805", Supplier Part Number 1=RL12T.012JCT-ND, Tolerance=±1%, Supplier 1=Digi-Key
R4: "Imported", Manufacturer_Name=Vishay-Dale, Supplier Part Number 1=541-84.5KLCT-ND, Manufacturer_Part_Number=CRCW040284K5FKED, RefDes=RefDes, Supplier 1=Digi-Key, Type=TYPE, Vendor=Vishay-Dale
R5: library part RES_68R_0402_5%, "Resistor SMD chip 68 Ohm 0.063W 5% 0402", Manufacturer 1=Yageo, Manufacturer 2="Samsung Electro-Mechanics America, Inc", Manufacturer 3="Stackpole Electronics Inc", Manufacturer 4="Rohm Semiconductor", Manufacturer Part Number 1=RC0402JR-0768RL, Manufacturer Part Number 2=RC1005J680CS, Manufacturer Part Number 3=RMCF0402JT68R0, Manufacturer Part Number 4=MCR01MRTJ680, Package / Case="0402 (1005 Metric)", Ratings="1/16 W", Supplier Part Number 1=311-68JRCT-ND, Tolerance=±5%, ComponentLink1Description=http://www.yageo.com/documents/recent/PYu-RC0402_51_RoHS_L_6.pdf, ComponentLink1URL=http://www.yageo.com/documents/recent/PYu-RC0402_51_RoHS_L_6.pdf, ComponentLink2Description=http://www.samsungsem.com/servlet/FileDownload?filename=productcatalog/pdf/Chip_Resistor.pdf, ComponentLink2URL=http://www.samsungsem.com/servlet/FileDownload?filename=productcatalog/pdf/Chip_Resistor.pdf, ComponentLink3Description=http://www.seielect.com/Catalog/SEI-RMCF_RMCP.pdf, ComponentLink3URL=http://www.seielect.com/Catalog/SEI-RMCF_RMCP.pdf, ComponentLink4Description=http://rohmfs.rohm.com/en/products/databook/datasheet/passive/resistor/chip_resistor/mcr_g.pdf, ComponentLink4URL=http://rohmfs.rohm.com/en/products/databook/datasheet/passive/resistor/chip_resistor/mcr_g.pdf, RoHS 1="RoHS Compliant", RoHS 2="RoHS Compliant", RoHS 3="RoHS Compliant", RoHS 4="RoHS Compliant", SCDType=spec, Supplier 1=Digi-Key, Supplier 2=Digi-Key, Supplier 3=Digi-Key, Supplier 4=Digi-Key, Supplier Part Number 2=1276-4348-1-ND, Supplier Part Number 3=RMCF0402JT68R0CT-ND, Supplier Part Number 4=RHM68CECT-ND
R6 R15_HB1 R15_HB2 R15_HB3 R16_HB1 R16_HB2 R16_HB3: library part RES_10K_0402_1%, "Resistor SMD chip 10k Ohm 0.063W 1% 0402", Manufacturer 1="Vishay Dale", Manufacturer 2=Yageo, Manufacturer Part Number 1=CRCW040210K0FKED, Manufacturer Part Number 2=RC0402FR-0710KL, Package / Case="0402 (1005 Metric)", Ratings="1/16 W", Supplier Part Number 1=541-10.0KLCT-ND, Tolerance=±1%, ComponentLink1Description=http://www.vishay.com/doc?20035, ComponentLink1URL=http://www.vishay.com/doc?20035, ComponentLink2Description=http://www.yageo.com/documents/recent/PYu-RC0402_51_RoHS_L_6.pdf, ComponentLink2URL=http://www.yageo.com/documents/recent/PYu-RC0402_51_RoHS_L_6.pdf, SCDType=spec, Supplier 1=Digi-Key, Supplier 2=Digi-Key, Supplier Part Number 2=311-10.0KLRCT-ND
R7: "Imported", Manufacturer_Name=Vishay-Dale, Supplier Part Number 1=541-25.5KLCT-ND, Manufacturer_Part_Number=CRCW040225K5FKED, RefDes=RefDes, Supplier 1=Digi-Key, Type=TYPE, Vendor=Vishay-Dale
R8: library part RES_40K2_0402_1%, "Resistor SMD chip 40.2K 1% 0402", Manufacturer=Yageo, Manufacturer Part Number=RC0603FR-074K7L, Package / Case="0402 (1608 Metric)", Ratings=1/10W, Supplier Part Number 1=311-40.2KLRCT-ND, Tolerance=±1%, SCDType=undef, Supplier 1=Digi-Key
R9_HB1 R9_HB2 R9_HB3 R11_HB1 R11_HB2 R11_HB3: library part RES_0R_0805, "Resistor SMD chip 0.0 Ohm 0.125W 0805", Manufacturer 1="Samsung Electro-Mechanics America, Inc", Manufacturer 2="Stackpole Electronics Inc", Manufacturer 3=Yageo, Manufacturer 4="Panasonic Electronic Components", Manufacturer 5="Rohm Semiconductor", Manufacturer Part Number 1=RC2012J000CS, Manufacturer Part Number 2=RMCF0805ZT0R00, Manufacturer Part Number 3=RC0805JR-070RL, Manufacturer Part Number 4=ERJ-6GEY0R00V, Manufacturer Part Number 5=MCR10ERTJ000, Package / Case="0805 (2012 metric)", Ratings=1/8W, Supplier Part Number 1=1276-5466-6-ND, Tolerance=N/A, ComponentLink1Description=http://www.samsungsem.com/servlet/FileDownload?filename=productcatalog/pdf/Chip_Resistor.pdf, ComponentLink1URL=http://www.samsungsem.com/servlet/FileDownload?filename=productcatalog/pdf/Chip_Resistor.pdf, ComponentLink2Description=http://www.seielect.com/Catalog/SEI-RMCF_RMCP.pdf, ComponentLink2URL=http://www.seielect.com/Catalog/SEI-RMCF_RMCP.pdf, ComponentLink3Description=http://media.digikey.com/pdf/Data%20Sheets/Yageo%20PDFs/RC0805%20Pb%20Free.pdf, ComponentLink3URL=http://media.digikey.com/pdf/Data%20Sheets/Yageo%20PDFs/RC0805%20Pb%20Free.pdf, ComponentLink4Description=http://industrial.panasonic.com/www-cgi/jvcr13pz.cgi?E+PZ+3+AOA0001+ERJ6GEY0R00V+7+WW, ComponentLink4URL=http://industrial.panasonic.com/www-cgi/jvcr13pz.cgi?E+PZ+3+AOA0001+ERJ6GEY0R00V+7+WW, ComponentLink5Description=http://rohmfs.rohm.com/en/products/databook/datasheet/passive/resistor/chip_resistor/mcr_g.pdf, ComponentLink5URL=http://rohmfs.rohm.com/en/products/databook/datasheet/passive/resistor/chip_resistor/mcr_g.pdf, RoHS 1="RoHS Compliant", RoHS 2="RoHS Compliant", RoHS 3="RoHS Compliant", RoHS 4="RoHS Compliant", RoHS 5="RoHS Compliant", SCDType=spec, Supplier 1=Digi-Key, Supplier 2=Digi-Key, Supplier 3=Digi-Key, Supplier 4=Digi-Key, Supplier 5=Digi-Key, Supplier Part Number 2=RMCF0805ZT0R00DKR-ND, Supplier Part Number 3=311-0.0ARDKR-ND, Supplier Part Number 4=P0.0ADKR-ND, Supplier Part Number 5=RHM0.0CPDKR-ND
R10_HB1 R10_HB2 R10_HB3 R12_HB1 R12_HB2 R12_HB3: library part RES_3R3_0805_5%, "Resistor SMD chip 3.3 Ohm 0.5W 0805", Manufacturer="Panasonic Electronic Components", Manufacturer Part Number=ERJ-6DQJ3R0V, Operating Temperature="-55°C ~ 155°C", Package / Case="0805 (2012 Metric)", Power (Watts)="0.5W, 1/2W", Supplier Device Package=0805, Supplier Part Number 1=P19231CT-ND, Temperature Coefficient=±100ppm/°C, Tolerance=±5%, Category=Resistors, ComponentLink1Description=https://industrial.panasonic.com/cdbs/www-data/pdf/RDN0000/AOA0000C313.pdf, ComponentLink1URL=https://industrial.panasonic.com/cdbs/www-data/pdf/RDN0000/AOA0000C313.pdf, Composition="Thick Film", Failure Rate=-, Features="Automotive AEC-Q200, Current Sense", Height - Seated (Max)="0.028\" (0.70mm)", Packaging="Cut Tape (CT)", Part Status=Active, Pricing 1="1=0.23, 10=0.198, 25=0.1444, 50=0.1046, 100=0.0776, 250=0.05952, 500=0.0469, 1000=0.03247 (USD)", RoHS="RoHS Compliant", Size / Dimension="0.079\" L x 0.049\" W (2.00mm x 1.25mm)", Stock 1=3694, Supplier 1=Digi-Key
R13_HB1 R13_HB2 R13_HB3 R14_HB1 R14_HB2 R14_HB3: library part RES_68R_0603_5%, "Resistor SMD chip 68 Ohm 0.1W 5% 0603", Manufacturer 1=Yageo, Manufacturer Part Number 1=RC0603JR-0768RL, Package / Case="0603 (1608 metric)", Ratings="1/10 W", Supplier Part Number 1=311-68GRCT-ND, Tolerance=±5%, Material="Thick Film", SCDType=spec, Supplier 1=Digi-Key
R17: library part RES_0R_0603, "Resistor SMD chip 0.0 Ohm 0.1W 0603", Manufacturer 1=Vishay/Dale, Manufacturer 2="Panasonic Electronic Components", Manufacturer 3=Yageo, Manufacturer Part Number 1=CRCW06030000Z0EA, Manufacturer Part Number 2=ERJ-3GEY0R00V, Manufacturer Part Number 3=AC0603JR-070RL, Package / Case="0603 (1608metric)", Ratings=1/10W, Supplier Part Number 1=541-0.0GCT-ND, Tolerance=±5%, ComponentLink1Description=http://www.vishay.com/doc?20035, ComponentLink1URL=http://www.vishay.com/doc?20035, ComponentLink2Description=http://industrial.panasonic.com/www-cgi/jvcr13pz.cgi?E+PZ+3+AOA0001+ERJ3GEY0R00V+7+WW, ComponentLink2URL=http://industrial.panasonic.com/www-cgi/jvcr13pz.cgi?E+PZ+3+AOA0001+ERJ3GEY0R00V+7+WW, ComponentLink3Description=http://www.yageo.com/documents/recent/PYu-AC_51_RoHS_L_2.pdf, ComponentLink3URL=http://www.yageo.com/documents/recent/PYu-AC_51_RoHS_L_2.pdf, RoHS 2="RoHS Compliant", RoHS 3="RoHS Compliant", SCDType=spec, Supplier 1=Digi-Key, Supplier 2=Digi-Key, Supplier 3=Digi-Key, Supplier Part Number 2=P0.0GTR-ND, Supplier Part Number 3=311-0.0LECT-ND
U1: "Imported", Manufacturer_Name="Texas Instruments", Manufacturer_Part_Number=TPS54229DDAR, Supplier Part Number 1=296-35686-1-ND, RefDes=RefDes, Supplier 1=Digi-Key, Type=TYPE, Vendor="Texas Instruments"
U2: library part "IC_Op-Amp_Current_Sense_ TS1101-50EG6T", "IC AMP PREC CS BIDIR 50V SOT23-6", Supplier Part Number 1=336-3367-1-ND, Supplier 1=Digi-Key
U3_HB1 U3_HB2 U3_HB3: library part GATE_DRV_2_600V_4.5A, "Half-Bridge Gate Driver IC Non-Inverting 8-SOP", Current - Peak Output (Source, Sink)="4.5A, 4.5A", Logic Voltage - VIL, VIH="1.2V, 2.5V", Manufacturer="Fairchild/ON Semiconductor", Operating Temperature="-40°C ~ 150°C (TJ)", Package / Case="8-SOIC (0.154\", 3.90mm Width)", Supplier Device Package=8-SOP, Supplier Part Number 1=FAN7390MXCT-ND, Voltage - Supply="10 V ~ 22 V", Category="Integrated Circuits (ICs)", Channel Type=Independent, ComponentLink1Description=https://www.fairchildsemi.com/datasheets/FA/FAN7390.pdf, ComponentLink1URL=https://www.fairchildsemi.com/datasheets/FA/FAN7390.pdf, Driven Configuration=Half-Bridge, Gate Type="IGBT, N-Channel MOSFET", Input Type=Non-Inverting, Manufacturer Part Number=FAN7390MX, Mounting Type="Surface Mount", Packaging="Cut Tape (CT)", Part Status=Active, Pricing 1="1=1.79, 10=1.61, 100=1.2944, 500=1.06348, 1000=0.88117 (USD)", Rise / Fall Time (Typ)="25ns, 20ns", RoHS="RoHS Compliant", Stock 1=5064, Supplier 1=Digi-Key

## Free pads (board coordinates)
  round 1.524 hole 3.175 unplated: 1(139.432,27.037) 1(139.432,59.041) 1(139.432,89.902) 1(169.432,57.037) 1(169.432,89.041) 1(169.432,119.902)

## Nets (pads, with @x,y where several pads share a name; then routed paths per layer and width w, separated by ;. In a path a pad name is that pad's centre, name@x,y a point inside that pad or via, vN(x,y) a via of type N, cw(c..) or ccw(c..) an arc to the next point about the centre after c; other vN are vias at no path point)
3.3V: R1.1 R3.2 R13_HB1.1 R13_HB2.1 R13_HB3.1 R14_HB1.1 R14_HB2.1 R14_HB3.1 U2.4
15V: C4.1 C5.1 C12_HB1.1 C12_HB2.1 C12_HB3.1 C13_HB1.1 C13_HB2.1 C13_HB3.1 D1_HB1.A D1_HB2.A D1_HB3.A P1.3 R17.1 U1.2 U3_HB1.5 U3_HB2.5 U3_HB3.5
350V: P1.1 Q1_HB1.8 Q1_HB2.8 Q1_HB3.8
GND: C2.2 C4.2 C5.2 C6.2 C7.2 C8.2 C9.2 C10.2 C11.2 C12_HB1.2 C12_HB2.2 C12_HB3.2 C13_HB1.2 C13_HB2.2 C13_HB3.2 LED1.K P1.2 R2.1 R6.2 R7.2 U1.4 U1.9 U2.1
HIN_HB1: Q4_HB1.1 Q4_HB2.1 Q4_HB3.1 R16_HB1.1 R16_HB2.1 R16_HB3.1 U3_HB1.1 U3_HB2.1 U3_HB3.1 | length 7.5
  Top Layer w0.508: R16_HB1.1 141.351,36.957 141.859,37.465 U3_HB1.1
LIN_HB1: Q3_HB1.1 Q3_HB2.1 Q3_HB3.1 R15_HB1.1 R15_HB2.1 R15_HB3.1 U3_HB1.2 U3_HB2.2 U3_HB3.2
NetC1_1: C1.1 U1.1
NetC1_2: C1.2 L1.2 U1.3
NetC2_1: C2.1 R1.2 R2.2
NetC3_1: C3.1 C8.1 L1.1 L2.1 R4.1 R5.1
NetC3_2: C3.2 R4.2 R7.1 U1.5
NetC6_1: C6.1 L2.2 R3.1 U2.5 U2.6
NetC7_1: C7.1 U1.6
NetC9_1: C9.1 R8.1 U2.3
NetC10_1: C10.1 U1.8
NetC11_1: C11.1 R8.2
NetC14_HB1_1: C14_HB1.1 C15_HB1.1 R9_HB1.2 U3_HB1.8
NetC14_HB1_2: C14_HB1.2 C15_HB1.2 R11_HB1.1 U3_HB1.6
NetC14_HB2_1: C14_HB2.1 C15_HB2.1 R9_HB2.2 U3_HB2.8
NetC14_HB2_2: C14_HB2.2 C15_HB2.2 R11_HB2.1 U3_HB2.6
NetC14_HB3_1: C14_HB3.1 C15_HB3.1 R9_HB3.2 U3_HB3.8
NetC14_HB3_2: C14_HB3.2 C15_HB3.2 R11_HB3.1 U3_HB3.6
NetD1_HB1_K: D1_HB1.K R9_HB1.1
NetD1_HB2_K: D1_HB2.K R9_HB2.1
NetD1_HB3_K: D1_HB3.K R9_HB3.1
NetLED1_A: LED1.A R5.2
NetLED2_HB1_A: LED2_HB1.A R14_HB1.2
NetLED2_HB1_K: LED2_HB1.K Q4_HB1.3
NetLED2_HB2_A: LED2_HB2.A pad.1@139.432,59.041 R14_HB2.2
NetLED2_HB2_K: LED2_HB2.K Q4_HB2.3
NetLED2_HB3_A: LED2_HB3.A R14_HB3.2
NetLED2_HB3_K: LED2_HB3.K Q4_HB3.3
NetLED3_HB1_A: LED3_HB1.A R13_HB1.2
NetLED3_HB1_K: LED3_HB1.K Q3_HB1.3
NetLED3_HB2_A: LED3_HB2.A R13_HB2.2
NetLED3_HB2_K: LED3_HB2.K Q3_HB2.3
NetLED3_HB3_A: LED3_HB3.A R13_HB3.2
NetLED3_HB3_K: LED3_HB3.K Q3_HB3.3
NetQ1_HB1_1: Q1_HB1.1 R10_HB1.2
NetQ1_HB1_2: Q1_HB1.2 R11_HB1.2
NetQ1_HB2_1: Q1_HB2.1 R10_HB2.2
NetQ1_HB2_2: Q1_HB2.2 R11_HB2.2
NetQ1_HB3_1: Q1_HB3.1 R10_HB3.2
NetQ1_HB3_2: Q1_HB3.2 R11_HB3.2
NetQ2_HB1_1: Q2_HB1.1 R12_HB1.2
NetQ2_HB1_2: Q2_HB1.2 Q2_HB1.3 Q2_HB1.4 Q2_HB1.5 Q2_HB1.6 Q2_HB1.7 Q2_HB2.2 Q2_HB2.3 Q2_HB2.4 Q2_HB2.5 Q2_HB2.6 Q2_HB2.7 Q2_HB3.2 Q2_HB3.3 Q2_HB3.4 Q2_HB3.5 Q2_HB3.6 Q2_HB3.7 Q3_HB1.2 Q3_HB2.2 Q3_HB3.2 Q4_HB1.2 Q4_HB2.2 Q4_HB3.2 R15_HB1.2 R15_HB2.2 R15_HB3.2 R16_HB1.2 R16_HB2.2 R16_HB3.2 U3_HB1.3 U3_HB2.3 U3_HB3.3
NetQ2_HB2_1: Q2_HB2.1 R12_HB2.2
NetQ2_HB3_1: Q2_HB3.1 R12_HB3.2
NetR6_1: R6.1 R17.2 U1.7
NetR10_HB1_1: R10_HB1.1 U3_HB1.7
NetR10_HB2_1: R10_HB2.1 U3_HB2.7
NetR10_HB3_1: R10_HB3.1 U3_HB3.7
NetR12_HB1_1: R12_HB1.1 U3_HB1.4
NetR12_HB2_1: R12_HB2.1 U3_HB2.4
NetR12_HB3_1: R12_HB3.1 U3_HB3.4
NetU2_2: U2.2
OUTPUT1: P2.1 Q1_HB1.3 Q1_HB1.4 Q1_HB1.5 Q1_HB1.6 Q1_HB1.7 Q2_HB1.8
OUTPUT2: P2.2 Q1_HB2.3 Q1_HB2.4 Q1_HB2.5 Q1_HB2.6 Q1_HB2.7 Q2_HB2.8
OUTPUT3: P2.3 pad.1@169.432,89.041 Q1_HB3.3 Q1_HB3.4 Q1_HB3.5 Q1_HB3.6 Q1_HB3.7 Q2_HB3.8
pads on no net: C1.0 C2.0 C3.0 C6.0 C7.0 C8.0 C9.0 C10.0 C11.0 C12_HB1.0 C12_HB2.0 C12_HB3.0 C13_HB1.0 C13_HB2.0 C13_HB3.0 D1_HB1.0 D1_HB2.0 D1_HB3.0 LED1.0 LED2_HB1.0 LED2_HB2.0 LED2_HB3.0 LED3_HB1.0 LED3_HB2.0 LED3_HB3.0 Q3_HB1.0 Q3_HB2.0 Q3_HB3.0 Q4_HB1.0 Q4_HB2.0 Q4_HB3.0 R1.0 R2.0 R3.0 R4.0 R5.0 R6.0 R7.0 R8.0 R9_HB1.0 R9_HB2.0 R9_HB3.0 R10_HB1.0 R10_HB2.0 R10_HB3.0 R11_HB1.0 R11_HB2.0 R11_HB3.0 R12_HB1.0 R12_HB2.0 R12_HB3.0 R13_HB1.0 R13_HB2.0 R13_HB3.0 R14_HB1.0 R14_HB2.0 R14_HB3.0 R15_HB1.0 R15_HB2.0 R15_HB3.0 R16_HB1.0 R16_HB2.0 R16_HB3.0 R17.0 U2.0 U3_HB1.0 U3_HB2.0 U3_HB3.0